# EAGLE board MAX31865-V1.0 (EAGLE 6.6.0)
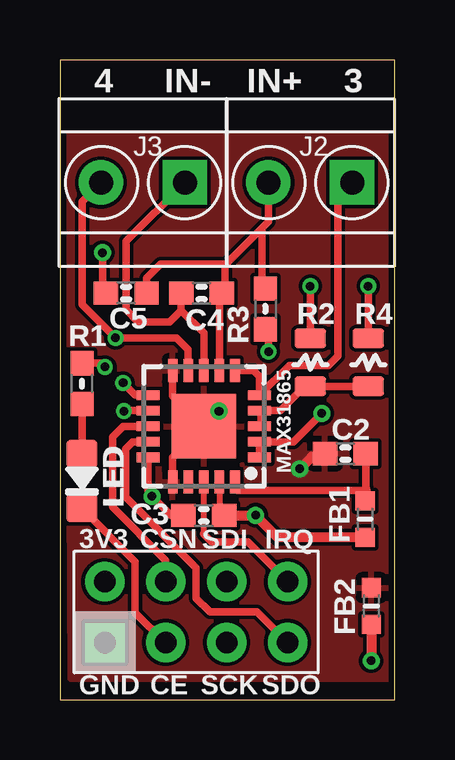
[diagram p0: board, top side]
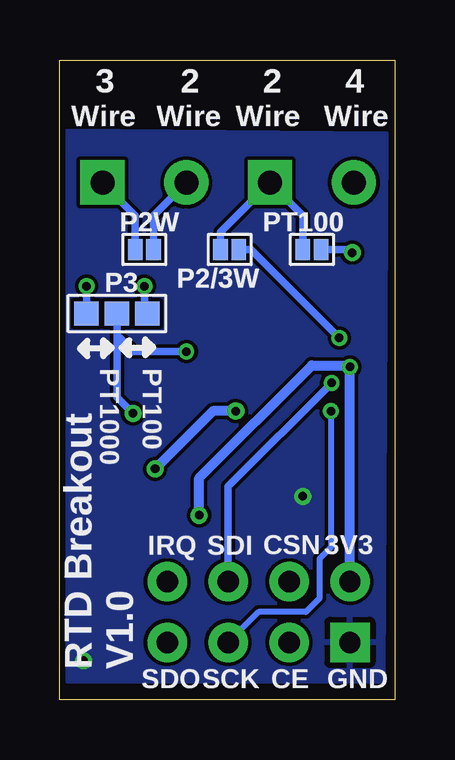
[diagram p1: board, bottom side, seen from below]

Size 13.97 x 26.67 mm. Coordinates in mm from the lower left corner, seen from the top.
Outline: 0,0 13.97,0 13.97,26.67 0,26.67 0,0
Copper layers (1*16): Top 0.035mm / dielectric 1.5mm / Bottom 0.035mm
Design rules "SeeedStudio_2layer_DRU_no_angle_20140221": minimum track width 6mil, minimum drill 12mil, track to track 6mil, track to pad 6mil, pad to pad 6mil, via to via 6mil, smd to smd 0mil, copper to edge 10mil, drill to drill 10mil, minimum pad ring 10mil, minimum via ring 6mil, stop-mask expansion 2mil, vias tented up to drill 100mil, thermal gap 10mil
Net classes: 1 power: width 0.203 mm, drill 0.305 mm, clearance 0.152 mm

## Footprints (pad centres in the part's own frame; a part is rotated, then mirrored left to right if it is on the bottom)
0603-CAP = smd 1.016 x 0.965: 1 -0.85,0; 2 0.85,0
_0603MP = smd 0.8 x 0.8: 1 -0.762,0; 2 0.762,0
2X4P-2.54 = drill 0.889 pad 1.651 square: 1 -1.27,3.81 | drill 0.889 pad 1.651: 2 -1.27,1.27; 3 -1.27,-1.27; 4 -1.27,-3.81; 5 1.27,-3.81; 6 1.27,-1.27; 7 1.27,1.27; 8 1.27,3.81
2P-3.5 = drill 1 pad 1.85 square: 1 -1.75,0 | drill 1 pad 1.85: 2 1.75,0
TQFN20-5X5 = smd 0.95 x 0.4: 1 -2.325,1.3; 2 -2.325,0.65; 3 -2.325,0; 4 -2.325,-0.65; 5 -2.325,-1.3; 11 2.325,-1.3; 12 2.325,-0.65; 13 2.325,0; 14 2.325,0.65; 15 2.325,1.3 | smd 0.4 x 0.95: 6 -1.3,-2.325; 7 -0.65,-2.325; 8 0,-2.325; 9 0.65,-2.325; 10 1.3,-2.325; 16 1.3,2.325; 17 0.65,2.325; 18 0,2.325; 19 -0.65,2.325; 20 -1.3,2.325 | smd 2.7 x 2.7: EXP 0,0
2P-SMD-1.78X1.27 = smd 0.889 x 0.61: 1 0,0.381; 2 0,-0.381
3P-SMD-4.1X1.5 = smd 1.016 x 1.016: 00 -1.27,0; 11 1.27,0; MM 0,0
0603-RES = smd 1.016 x 0.965: 1 -0.85,0; 2 0.85,0
0805-RES = smd 0.8 x 1.3: 1 -1,0; 2 1,0
0805-LED-LARGEPADS = smd 1.156 x 1.3: MINUS -1.127,0; PLUS 1.127,0

## Placement (x,y rotation side)
C2  100nF  [0603-CAP]  11.91,10.26 180 top
C3  100nF  [0603-CAP]  6,7.68 180 top
C4  10nF  [0603-CAP]  5.91,16.95 180 top
C5  100nF  [0603-CAP]  2.76,16.95 0 top
FB1  [_0603MP]  12.73,7.52 90 top
FB2  [_0603MP]  12.99,3.91 90 top
J1  NRF connector  [2X4P-2.54]  5.68,3.65 90 top
J2  SCREW-TERMINAL  [2P-3.5]  10.45,21.56 180 top
J3  SCREW-TERMINAL  [2P-3.5]  3.46,21.56 180 top
MAX31865  MAX31865  [TQFN20-5X5]  6,11.4 180 top
P2/3W  4 Wire  [2P-SMD-1.78X1.27]  6.89,18.76 270 bottom
P2W  3 Wire  [2P-SMD-1.78X1.27]  10.45,18.76 270 bottom
P3  [3P-SMD-4.1X1.5]  11.59,16.1 0 bottom
PT100  [2P-SMD-1.78X1.27]  3.46,18.76 90 bottom
R1  1K  [0603-RES]  0.92,13.18 90 top
R2  390 .1%  [0805-RES]  10.45,14.07 90 top
R3  10M  [0603-RES]  8.57,16.29 270 top
R4  3.9K .1%  [0805-RES]  12.86,14.07 90 top
U$1  LED0805-LARGE  [0805-LED-LARGEPADS]  0.92,9.11 90 top

## Library data of the parts
C2-C5 MAX31865 R1-R4 U$1 = _c2h
FB1 FB2 = microbuilder
J1 = Seeed-Connector
J2 J3 = seeed-OPL
P2/3W P2W P3 PT100 = Seeed-Discrete; PARTNO: DNP

## Nets
AGND [power]: C2.2 FB2.2 MAX31865.10 MAX31865.16 MAX31865.EXP
AVDD [power]: C2.1 FB1.2 MAX31865.20
CE: J1.2 U$1.MINUS
CSN: J1.7 MAX31865.13
F+: J2.1 MAX31865.5 MAX31865.6 P2W.2
F-: J3.2 MAX31865.9 P2/3W.1
GND [power]: C3.2 FB2.1 J1.1 MAX31865.15
IN+: C4.1 C5.2 J2.2 MAX31865.7 P2W.1 R3.1
IN-: C4.2 J3.1 MAX31865.8 P2/3W.2 PT100.1
IRQ: J1.5 MAX31865.18
MISO: J1.4 MAX31865.14
MOSI: J1.6 MAX31865.11
N$2: R1.1 U$1.PLUS
N$6: P3.11 R2.2
N$7: MAX31865.3 MAX31865.4 R2.1 R4.1
N$9: MAX31865.1 MAX31865.2 P3.MM R3.2
N$10: P3.00 R4.2
N$11: C5.1 PT100.2
SCK: J1.3 MAX31865.12
VCC [power]: C3.1 FB1.1 J1.8 MAX31865.19 R1.2

## Tracks (layer width: path | path; a pad name or v marks a point on that pad's centre or on a via)
AGND  (via drill 0.36 pad 0.71)
  Top 0.305: v6.64,12.03 6,12.03 | 6,12.03 5.34,12.03 4.7,12.67 MAX31865.10 | MAX31865.16 4.7,10.1 MAX31865.EXP 6,12.03
  Top 0.406: v10,9.62 10.51,10.13 11.06,10.13 C2.2
  Bottom 0.406: v6.64,12.03 7.59,12.03 v10,9.62
  pour Top: 0.29,23.59 0.41,0.86 13.75,0.86 13.62,23.59
AVDD
  Top 0.305: C2.1 12.76,8.86 | 12.76,8.86 12.88,8.39 FB1.2 | MAX31865.20 7.3,8.83 7.4,8.73 12.76,8.73 12.76,8.86
CE
  Top 0.254: U$1.MINUS 0.92,7.97 | J1.2 4.38,2.38
  Top 0.305: 4.38,2.38 3.14,3.62 3.14,5.75 0.92,7.97
CSN
  Top 0.305: J1.7 4.41,5.81 2.19,8.03 2.19,10.95 2.63,11.4 MAX31865.13
F+
  Top 0.305: MAX31865.6 8.07,13.72 8.33,13.47 MAX31865.5 9.57,13.94 11.21,13.94 11.59,14.32 11.59,20.95 J2.1
  Bottom 0.305: P2W.2 10.83,20.19 J2.1
F-  (via drill 0.36)
  Top 0.305: J3.2 0.92,20.77 0.92,16.48 v2.32,15.08 4.86,15.08 5.33,14.61 5.33,13.74 MAX31865.9
  Bottom 0.305: P2/3W.1 6,18.76 v2.32,15.08
GND  (via drill 0.36 pad 0.71)
  Top 0.254: MAX31865.15
  Top 0.305: MAX31865.15 3.68,8.64 v3.84,8.48 4.64,7.68 C3.2
  Top 0.406: FB2.1 v12.99,1.62
  pour Bottom: 0.48,0.79 0.35,23.58 13.68,23.7 13.68,0.79
IN+
  Top 0.305: J2.2 8.7,19.93 8.42,19.66 | MAX31865.7 6.65,16.85 C4.1 6.88,17.08 6.88,18.12 6.92,18.16 | 6.92,18.16 8.42,19.66 | R3.1 8.42,16.99 8.42,19.66 | C5.2 3.61,17.58 4.19,18.16 6.92,18.16
  Bottom 0.305: P2W.1 10.06,20.19 J2.2
IN-
  Top 0.305: J3.1 2.76,19.11 2.76,16.26 3.27,15.75 4.58,15.75 5.06,16.22 | C4.2 5.06,16.22 | MAX31865.8 6,15.28 5.06,16.22
  Bottom 0.305: P2/3W.2 7.27,19.5 J3.1 3.84,20.19 PT100.1
IRQ
  Top 0.203: MAX31865.18 5.99,8.87
  Top 0.254: 5.99,8.87 5.99,6.9
  Top 0.305: J1.5 7.84,6.57 6.32,6.57 5.99,6.9
MISO
  Top 0.305: J1.4 8.22,3.65 6.25,3.65 5.68,4.22 5.68,5.49 2.73,8.45 2.73,10.45 3.03,10.75 MAX31865.14
MOSI  (via drill 0.36)
  Top 0.305: MAX31865.11 3.14,12.71 v2.63,13.21
  Bottom 0.254: 3.84,12 v2.63,13.21
  Bottom 0.305: J1.6 6.95,8.89 v2.63,13.21
N$2
  Top 0.305: U$1.PLUS R1.1
N$6  (via drill 0.36)
  Top 0.305: R2.2 v10.45,17.24
  Bottom 0.305: v10.45,17.24 10.45,16.1 P3.11
N$7
  Top 0.203: MAX31865.4 MAX31865.3
  Top 0.305: MAX31865.4 9.19,12.05 10.19,13.05 10.45,13.05 R2.1 R4.1
N$9  (via drill 0.36 pad 0.66, 0.36 pad 0.71)
  Top 0.305: v10.92,11.94 9.73,10.75 MAX31865.2 MAX31865.1 | 8.66,15.44 R3.2 8.7,15.31 v8.7,14.51
  Bottom 0.305: v8.7,14.51 10.89,14.51 11.59,15.21 | P3.MM 11.59,15.21 | 11.59,15.21 11.59,12.61 v10.92,11.94
N$10  (via drill 0.36)
  Top 0.305: R4.2 v12.86,17.24
  Bottom 0.305: v12.86,17.24 P3.00
N$11  (via drill 0.36 pad 0.71)
  Top 0.305: v1.78,18.64 1.78,17.47 C5.1
  Bottom 0.305: v1.78,18.64 1.91,18.76 PT100.2
SCK  (via drill 0.36)
  Top 0.254: 2.67,12.05 v2.67,12.03
  Top 0.305: MAX31865.12 2.67,12.05
  Bottom 0.254: J1.3 5.68,3.65 3.71,3.65 3.14,4.22 3.14,5.87 2.67,6.35 v2.67,12.03
VCC  (via drill 0.36, 0.36 pad 0.71)
  Top 0.254: 7.14,7.99 C3.1 6.65,8.14 MAX31865.19
  Top 0.305: R1.2 1.72,14.03 v1.87,13.88
  Top 0.406: C3.1 v8.16,7.68 9.08,6.76 FB1.1
  Bottom 0.406: J1.8 v1.87,13.88 1.94,13.94 3.46,13.94 8.16,9.24 v8.16,7.68

## Text on the board
tNames: 4 | IN- | IN+ | 3 | R1 | LED | 3V3 | CSN | SDI | IRQ | GND | CE | SCK | SDO
bNames: 4 | 2 | 2 | 3 | Wire | Wire | Wire | Wire | PT100 | PT1000 | 3V3 | CSN | SDI | IRQ | RTD Breakout / V1.0 | GND | CE | SCK | SDO
_tNames: J3 | J2 | R2 | R4 | C4 | R3 | R1 | C5 | C2 | MAX31865 | FB1 | LED | C3 | FB2
_bNames: PT100 | P2W | P3 | P2/3W
_bFinish: P3